# Altium PCB PCB_Assign.PcbDoc
Units mil, origin at the board's own origin, x right, y up, seen from the top; angles counter-clockwise.
Board outline 2650 x 980 mil, 2 copper layers (Top Layer, Bottom Layer); 10 components, 7 nets, 26 pads, 4 vias.
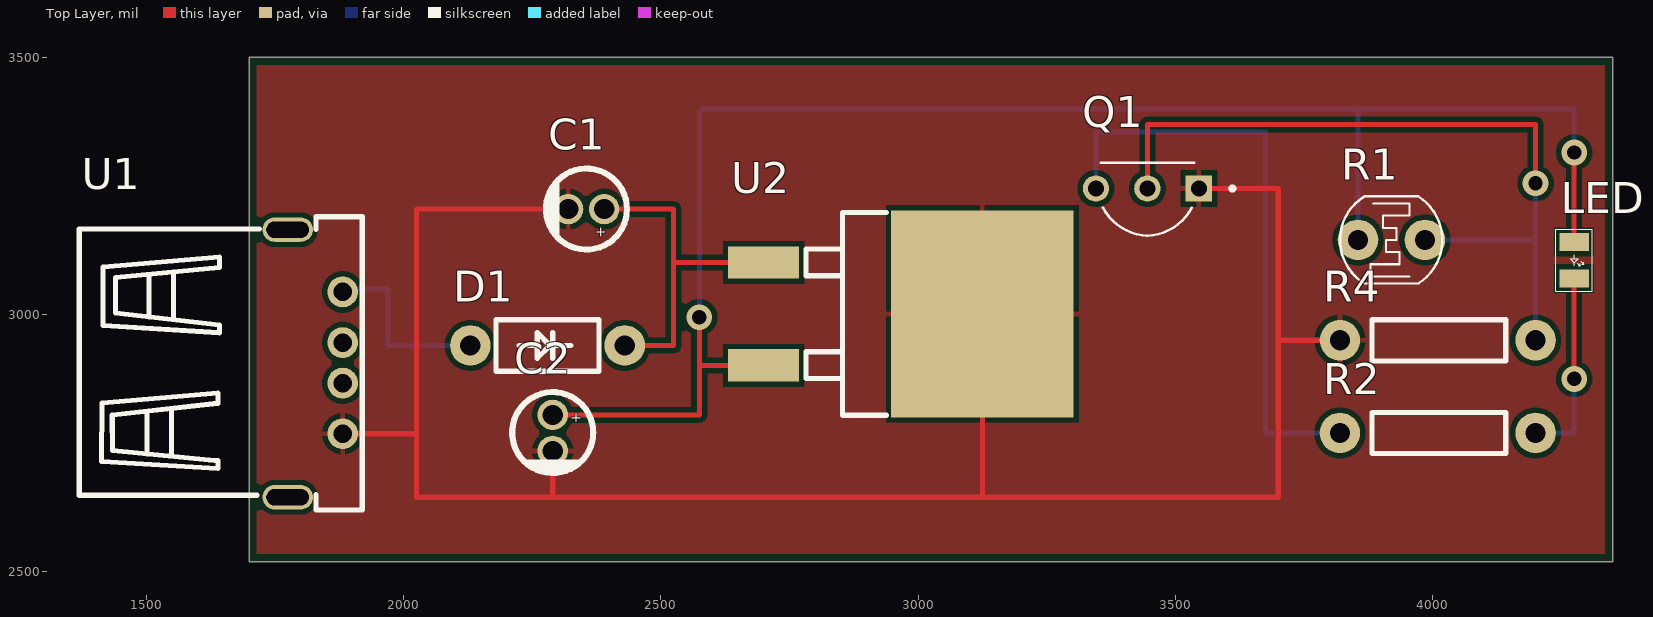
[diagram p0: Top Layer view]
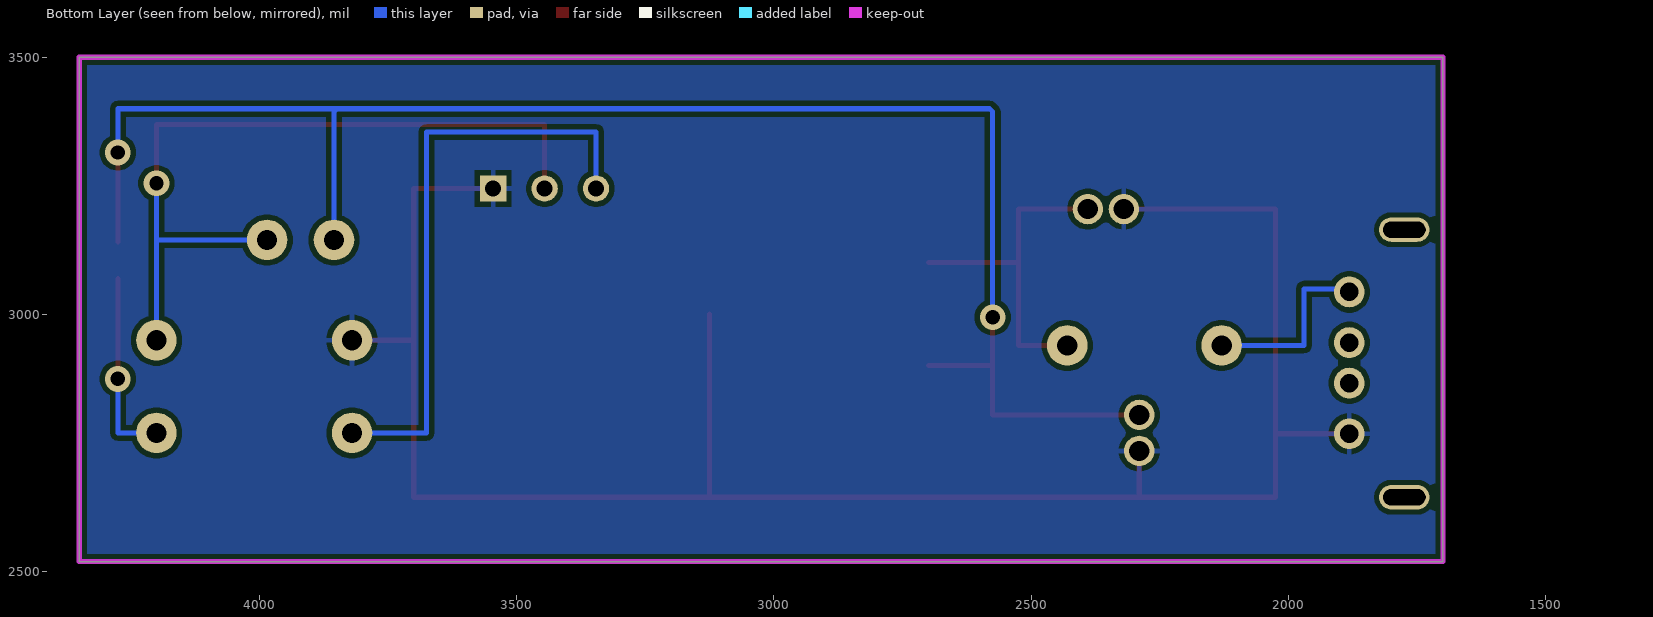
[diagram p1: Bottom Layer view, seen from below]
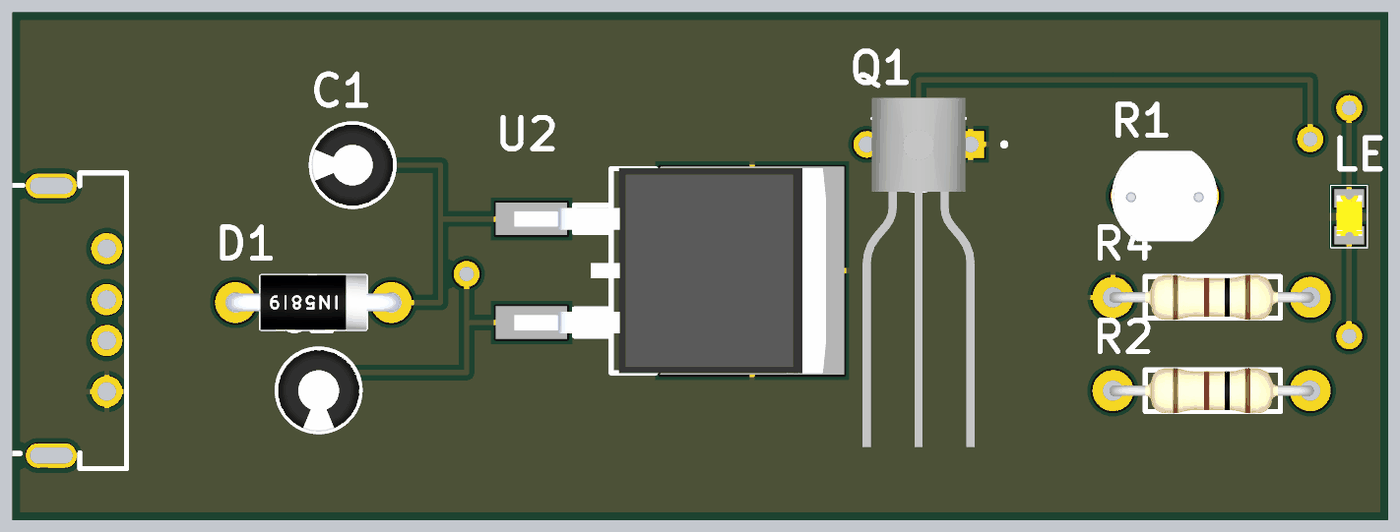
[diagram p2: 3D render of the assembled board from above, using the file's embedded part models]

## Layer stack, top to bottom
Top Solder: solder mask 0.4, Solder Resist, Dk 3.5
Top Layer: signal copper 1.4
Dielectric 1: dielectric 12.6, FR-4, Dk 4.8
Bottom Layer: signal copper 1.4
Bottom Solder: solder mask 0.4, Solder Resist, Dk 3.5

## Board outline
1700,2520 1700,3500 4350,3500 4350,2520

## Design rules (kind name [scope] priority, off if disabled: settings)
Clearance [All] p1: gap=10 ignorepadtopadclearanceinfootprint=FALSE
PolygonConnect [All] p1: connectstyle=Relief reliefconductorwidth=10 reliefentries=4 polygonreliefangle="90 Angle" airgapwidth=10
RoutingVias [All] p1: holewidth=28 width=50 viastyle="Through Hole" minholewidth=28 minwidth=50 maxholewidth=28 maxwidth=50
SolderMaskExpansion [All] p1: expansion=4 istentingtop=FALSE
SupplyNets "Schematic Supply Nets" [InNet('GND')] p1: voltage=0.000
Width [All] p1: maxlimit=10 minlimit=10 preferedwidth=10
30 further rules are at their usual default settings.

## Components (designator, comment, footprint, x,y, rotation, side; value= is the part's Value field where it differs from the comment)
C1 "10uF/50V" 10uF/50V 2355,3205 r180 top
C2 "10uF/50V" 10uF/50V 2290,2770 r270 top
D1 "1N5819" 1N5819 2280,2940 r270 top
LED "YELLOW" LED_0805_YELLOW 4275,3105.43 r180 top
Q1 "2N2222A" TO92254P470H750-3 3445.71,3153.23 r180 top
R1 "LDR" LDR 3920,3145 r0 top
R2 "330" RESISTOR_PTH_9.5mm 4010,2770 r180 top
R4 "10k" RESISTOR_PTH_9.5mm 4010,2950 r180 top
U1 "USB" USB 1685,2905 r270 top
U2 "L7805" L7805_smd 2985,2980 r0 top

## Footprints (in the part's own frame and the unit in brackets; to place one, negate y for a bottom-side part, rotate by r counter-clockwise, add the part's x,y. Pads: shape width x height; smd on the part's side, far side on the other; paste and mask are expansions set on the pad)
1N5819 [mm] "Rectifier Schottky 40V 1A DO-15"
  round 2 hole 1: 1(0,-3.81) 2(0,3.81)
  silkscreen extent -1.27,-2.54 1.27,2.54, body extent -1.35,-4.24 1.35,4.24, height 3.35
10uF/50V [mm] "ELECTROLYTIC CAPACITOR 4mm"
  round 1.5 hole 1: 1(0.889,0) 2(-0.889,0)
  silkscreen extent -2.02,-2 2.03,2, body extent -1.99,-1.99 2.01,1.99, height 7.01
L7805_smd [mm] "TO-252-3"
  rect 3.5x1.6 smd: 1(-7.239,3.08) 3(-7.239,-2)
  rect 9x10.2 smd: 2(3.556,0.54)
  silkscreen extent -5.14,-4.46 -1.18,5.54, body extent -8.08,-4.49 7.17,5.57, height 4.57
LDR [mm] "LIGHT DEPENDEND RESISTOR/PHOTORESITOR 3mm"
  round 2 hole 1: 1(-1.651,0) 2(1.651,0)
  silkscreen extent -2.54,-2.15 2.51,2.15, body extent -2.51,-2.2 2.51,2.11, height 6.08
LED_0805_YELLOW [mm]
  rect 1.45x0.9 smd: 1(0,-0.9) 2(0,0.9)
  silkscreen extent -0.89,-1.53 0.9,1.52, body extent -0.63,-1.06 0.62,0.94, height 1.1
RESISTOR_PTH_9.5mm [mm]
  round 2 hole 1: 1(-4.826,0) 2(4.826,0)
  silkscreen extent -3.36,-1.02 3.24,1.02, body extent -5,-1.11 5,1.11, height 2.61
TO92254P470H750-3 [mm]
  rect 1.298x1.298 / inner round 1.298 / far side rect 1.298x1.298 hole 0.79: 1(-2.54,-2.33)
  round 1.298 hole 0.79: 2(0,-2.33) 3(2.54,-2.33)
  silkscreen extent -4.29,-3.6 2.3,0, body extent -2.74,-4.6 2.74,12.5, height 2.3
USB [mil]
  round 60 hole 36 paste-99999 mask+2: 1(-139.01,196.91) 2(-40.61,196.91) 3(38.2,196.91) 4(136.59,196.91)
  oval 47.24x98.43 hole 31.5 slot 82.68 at 90 deg paste-99999 mask+2: ""(-260,90) ""(260,90)
  silkscreen extent -285,-315 285,235, body extent -309,-317 309,240, height 301

## Part data
C1 C2: "Electrolytic Capacitor 10uF/50V"
D1: "Rectifier Schottky 40V 1A DO-15", JLCPCB PN=C437199, ComponentLink1Description=Datasheet, ComponentLink1URL=https://www.mouser.com/datasheet/2/849/1n5817-2577238.pdf, Digikey PN=497-6610-1-ND, Mouser PN=637-1N5819
LED: library part LED_0805_YELLOW, "LED 0805 Yellow.", JLCPCB PN=C84261
Q1: "Bipolar (BJT) Transistor NPN 40 V 600 mA 250MHz 625 mW Through Hole TO-92", PACKAGE="TO-92-3 Diotec", Availability="In Stock", Check_prices=https://www.snapeda.com/parts/2N2222A/Diotec/view-part/?ref=eda, MF="Diotec Semiconductor", MP=2N2222A, Price=None, Purchase-URL=https://pricing.snapeda.com/search/part/2N2222A/?ref=eda, SnapEDA_Link=https://www.snapeda.com/parts/2N2222A/Diotec/view-part/?ref=snap
R1: "LIGHT DEPENDEND RESISTOR/PHOTORESITOR", Digikey PN=PDV-P8107-ND
R2 R4: library part RESISTOR_9.5mm, "Generic Resistor 9.5mm."
U2: "IC REG LINEAR 5V 1.5A TO220AB", JLCPCB PN PTH=C347289, JLCPCB PN SMD=C15077, ComponentLink1Description=Datasheet, ComponentLink1URL=https://www.mouser.com/datasheet/2/389/l78-1849632.pdf, Digikey PN=497-1443-5-ND, Mouser PN=511-L7805CV

## Via types
v1: diameter 50, hole 28, Top Layer to Bottom Layer, 4 vias

## Nets (pads, with @x,y where several pads share a name; then routed paths per layer and width w, separated by ;. In a path a pad name is that pad's centre, name@x,y a point inside that pad or via, vN(x,y) a via of type N, cw(c..) or ccw(c..) an arc to the next point about the centre after c; other vN are vias at no path point)
GND: C1.1 C2.1 Q1.1 R4.2 U1.4 U2.2 | length 3993.6
  Top Layer w10: U1.4 2025,2768.41 ; C2.1 2290,2645 ; C1.1 2025,3205 2025,2768.41 ; U2.2 3125,2645 ; Q1.1 3700,3244.96 3700,2950 ; R4.2 3700,2950 ; 2025,2768.41 2025,2645 2290,2645 ; 2290,2645 3125,2645 ; 3125,2645 3700,2645 3700,2950
NetC1_2: C1.2 D1.2 U2.1 | length 670
  Top Layer w10: C1.2 2525,3205 2525,3101.25 ; D1.2 2525,2940 2525,3101.25 ; U2.1 2525,3101.25
NetC2_2: C2.2 LED.1 R1.1 U2.3 | length 3218.1
  Top Layer w10: C2.2 2575,2805 2575,2901.25 ; v1(2575,2995) 2575,2901.25 ; U2.3 2575,2901.25 ; LED.1 v1(4275,3315)
  Bottom Layer w10: v1(2575,2995) 2575,3394.14 2580.86,3400 3849.14,3400 ; R1.1 3855,3394.14 3849.14,3400 ; v1(4275,3315) 4275,3400 3849.14,3400
NetD1_1: D1.1 U1.1 | length 364.1
  Bottom Layer w10: U1.1 1881.91,3050 1970,3050 1970,2940 D1.1
NetLED_2: LED.2 R2.1 | length 375
  Top Layer w10: v1(4275,2875) LED.2
  Bottom Layer w10: R2.1 4275,2770 v1(4275,2875)
NetQ1_2: Q1.2 R1.2 R4.1 | length 1510.8
  Top Layer w10: Q1.2@3445.71,3246.73 3445.71,3369.14 4200,3369.14 v1(4200,3255)
  Bottom Layer w10: R1.2 4200,3145 ; R4.1 4200,3145 ; v1(4200,3255) 4200,3145
NetQ1_3: Q1.3 R2.2 | length 1169.3
  Bottom Layer w10: Q1.3 3345.71,3355 3675,3355 3675,2770 R2.2
pads on no net: U1. U1.2 U1.3

## Polygon pours and split planes (outlines as drawn)
GND on Bottom Layer "GND_L02_P000" (solid, remove dead copper, pour order 0): 1700,3500 1700,2520 4350,2520 4350,3500
GND on Top Layer "GND_L01_P002" (solid, remove dead copper, pour order 2): 1715,3485 1715,2535 4335,2535 4335,3485

## Keep-outs
Bottom Layer:
  the board outline again, w10

## Text inside footprints (layer, text, board x,y; h text height)
C1: Top Overlay "+" at 2395,3168.28 h19.68 r180
C2: Top Overlay "+" at 2326.72,2810 h19.68 r270